# Altium PCB PCB.PcbDoc (part 2 of 6)
Units mm, origin at the board's own origin, x right, y up, seen from the top; angles counter-clockwise.
Board outline 190 x 64 mm, 6 copper layers (SIG 1, GND 1, SIG 2, PWR, GND 2, SIG 3), stack 1.565 mm thick; 489 components, 387 nets, 1828 pads, 1817 vias.
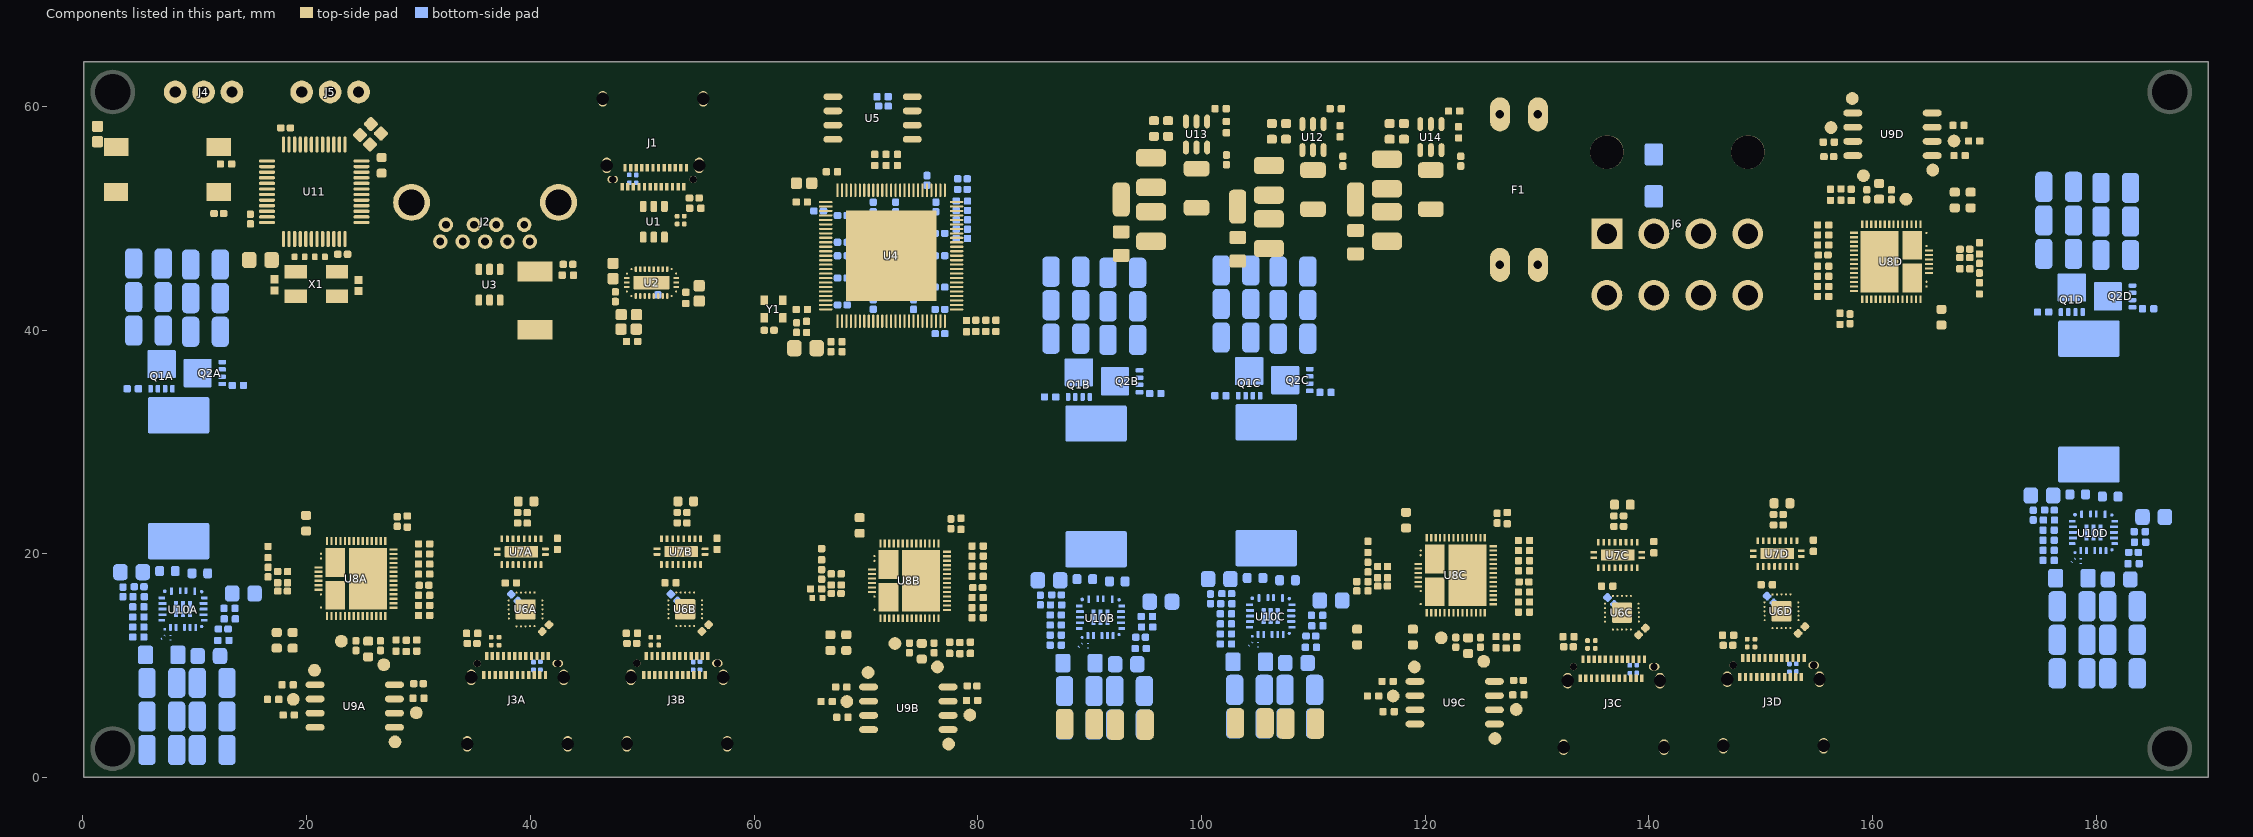
[diagram p6: the components of this part, seen from the top]

## Components (designator, comment, footprint, x,y, rotation, side; value= is the part's Value field where it differs from the comment) (continued)
R55A "4.7k 5% 0402" RESC1005X04M 30,7.1 r180 top value=4k7 (schematic designator R55)
R55B "4.7k 5% 0402" RESC1005X04M 79.5,6.9 r180 top value=4k7 (schematic designator R55)
R55C "4.7k 5% 0402" RESC1005X04M 128.35,7.4 r180 top value=4k7 (schematic designator R55)
R55D "4.7k 5% 0402" RESC1005X04M 156.1,56.825 r0 top value=4k7 (schematic designator R55)
R56A "715k 1% 0402" RESC1005X04M 13.099,15.136 r180 bottom value=715k (schematic designator R56)
R56B "715k 1% 0402" RESC1005X04M 95.129,14.407 r180 bottom value=715k (schematic designator R56)
R56C "715k 1% 0402" RESC1005X04M 110.348,14.514 r180 bottom value=715k (schematic designator R56)
R56D "715k 1% 0402" RESC1005X04M 183.909,21.992 r180 bottom value=715k (schematic designator R56)
R57A "0 Ohm 1% 0402" RESC1005X04M 4.451,34.772 r180 bottom value=0 (schematic designator R57)
R57B "0 Ohm 1% 0402" RESC1005X04M 86.481,34.043 r180 bottom value=0 (schematic designator R57)
R57C "0 Ohm 1% 0402" RESC1005X04M 101.7,34.15 r180 bottom value=0 (schematic designator R57)
R57D "0 Ohm 1% 0402" RESC1005X04M 175.261,41.628 r180 bottom value=0 (schematic designator R57)
R58A "0 Ohm 1% 0402" RESC1005X04M 13.851,35.072 r0 bottom value=0 (schematic designator R58)
R58B "0 Ohm 1% 0402" RESC1005X04M 95.881,34.343 r0 bottom value=0 (schematic designator R58)
R58C "0 Ohm 1% 0402" RESC1005X04M 111.1,34.45 r0 bottom value=0 (schematic designator R58)
R58D "0 Ohm 1% 0402" RESC1005X04M 184.661,41.928 r0 bottom value=0 (schematic designator R58)
R59A "100k 1% 0402" RESC1005X04M 13.125,14.197 r0 bottom value=100k (schematic designator R59)
R59B "100k 1% 0402" RESC1005X04M 95.154,13.467 r0 bottom value=100k (schematic designator R59)
R59C "100k 1% 0402" RESC1005X04M 110.373,13.574 r0 bottom value=100k (schematic designator R59)
R59D "100k 1% 0402" RESC1005X04M 183.935,21.052 r0 bottom value=100k (schematic designator R59)
R60A "10m 1W 1% 1206" R1206 7.03,10.973 r180 bottom value=10m (schematic designator R60)
R60B "10m 1W 1% 1206" R1206 89.06,10.243 r180 bottom value=10m (schematic designator R60)
R60C "10m 1W 1% 1206" R1206 104.279,10.351 r180 bottom value=10m (schematic designator R60)
R60D "10m 1W 1% 1206" R1206 177.841,17.828 r180 bottom value=10m (schematic designator R60)
R61A "100k 1% 0402" RESC1005X04M 4.951,13.472 r0 bottom value=100k (schematic designator R61)
R61B "100k 1% 0402" RESC1005X04M 86.981,12.743 r0 bottom value=100k (schematic designator R61)
R61C "100k 1% 0402" RESC1005X04M 102.2,12.85 r0 bottom value=100k (schematic designator R61)
R61D "100k 1% 0402" RESC1005X04M 175.761,20.328 r0 bottom value=100k (schematic designator R61)
R62A "29k4 1% 0402" RESC1005X04M 4.951,12.572 r180 bottom value=29k4 (schematic designator R62)
R62B "29k4 1% 0402" RESC1005X04M 86.981,11.843 r180 bottom value=29k4 (schematic designator R62)
R62C "29k4 1% 0402" RESC1005X04M 102.2,11.95 r180 bottom value=29k4 (schematic designator R62)
R62D "29k4 1% 0402" RESC1005X04M 175.761,19.428 r180 bottom value=29k4 (schematic designator R62)
R63A "20k 0402 1%" RESC1005X04M 4.951,15.272 r180 bottom value=20k (schematic designator R63)
R63B "20k 0402 1%" RESC1005X04M 86.981,14.543 r180 bottom value=20k (schematic designator R63)
R63C "20k 0402 1%" RESC1005X04M 102.2,14.65 r180 bottom value=20k (schematic designator R63)
R63D "20k 0402 1%" RESC1005X04M 175.761,22.128 r180 bottom value=20k (schematic designator R63)
R64A "39k 1% 0402" RESC1005X04M 12.551,12.272 r0 bottom value=39k (schematic designator R64)
R64B "39k 1% 0402" RESC1005X04M 94.581,11.543 r0 bottom value=39k (schematic designator R64)
R64C "39k 1% 0402" RESC1005X04M 109.8,11.65 r0 bottom value=39k (schematic designator R64)
R64D "39k 1% 0402" RESC1005X04M 183.361,19.128 r0 bottom value=39k (schematic designator R64)
R65A "59k 1% 0402" RESC1005X04M 4.98,16.172 r180 bottom value=59k (schematic designator R65)
R65B "59k 1% 0402" RESC1005X04M 87.01,15.443 r180 bottom value=59k (schematic designator R65)
R65C "59k 1% 0402" RESC1005X04M 102.228,15.55 r180 bottom value=59k (schematic designator R65)
R65D "59k 1% 0402" RESC1005X04M 175.79,23.028 r180 bottom value=59k (schematic designator R65)
R66A "0 Ohm 1% 0402" RESC1005X04M 4.951,14.372 r180 bottom value=0 (schematic designator R66)
R66B "0 Ohm 1% 0402" RESC1005X04M 86.981,13.643 r180 bottom value=0 (schematic designator R66)
R66C "0 Ohm 1% 0402" RESC1005X04M 102.2,13.75 r180 bottom value=0 (schematic designator R66)
R66D "0 Ohm 1% 0402" RESC1005X04M 175.761,21.228 r180 bottom value=0 (schematic designator R66)
R67 "100R2F" RESC0402(1005)_L 19.364,46.57 r0 top value=100
R68 "100R2F" RESC0402(1005)_L 21.185,46.57 r180 top value=100
R69 "0 Ohm 1% 0805" RESC2013X06M 103.251,47.244 r270 top value=0
R70 "162k 1% 0402" RESC1005X04M 112.014,59.817 r180 top value=162k
R71 "30.9k 1% 0402" RESC1005X04M 112.4,57.8 r270 top value=30k9
R72 "0 Ohm 1% 0805" RESC2013X06M 92.837,47.752 r270 top value=0
R73 "180k 1% 0402" RESC1005X04M 101.727,59.817 r180 top value=180k
R74 "62k 1% 0402" RESC1005X04M 102.235,58.166 r270 top value=62k
R75 "0 Ohm 1% 0805" RESC2013X06M 113.792,47.879 r270 top value=0
R76 "24.9k 1% 0402" RESC1005X04M 122.6,59.6 r180 top value=24k9
R77 "62k 1% 0402" RESC1005X04M 123,57.7 r270 top value=62k
R78 "10k 1% 0402" RESC1005X04M 12.791,54.866 r180 top value=10k
R79 "0 Ohm 1% 0603" RESC1508X05M 25.25,57.95 r225 top value=0
R80 "0 Ohm 1% 0603" RESC1508X05M 26.15,57.1 r225 top value=0
SW1 "FSMSM" TECO-FSMSM-2_V 7.555,56.372 r0 top
SW2 "FSMSM" TECO-FSMSM-2_V 7.545,52.355 r180 top
TP1A "45mil Test Point" "45mil Test Point Footprint" 23.1,12.2 r90 top (schematic designator TP1)
TP1B "45mil Test Point" "45mil Test Point Footprint" 72.6,12 r90 top (schematic designator TP1)
TP1C "45mil Test Point" "45mil Test Point Footprint" 121.45,12.5 r90 top (schematic designator TP1)
TP1D "45mil Test Point" "45mil Test Point Footprint" 163,51.725 r270 top (schematic designator TP1)
TP2A "45mil Test Point" "45mil Test Point Footprint" 26.9,10.1 r90 top (schematic designator TP2)
TP2B "45mil Test Point" "45mil Test Point Footprint" 76.4,9.9 r90 top (schematic designator TP2)
TP2C "45mil Test Point" "45mil Test Point Footprint" 125.25,10.4 r90 top (schematic designator TP2)
TP2D "45mil Test Point" "45mil Test Point Footprint" 159.2,53.825 r270 top (schematic designator TP2)
TP3A "45mil Test Point" "45mil Test Point Footprint" 20.7,9.6 r90 top (schematic designator TP3)
TP3B "45mil Test Point" "45mil Test Point Footprint" 70.2,9.4 r90 top (schematic designator TP3)
TP3C "45mil Test Point" "45mil Test Point Footprint" 119.05,9.9 r90 top (schematic designator TP3)
TP3D "45mil Test Point" "45mil Test Point Footprint" 165.4,54.325 r270 top (schematic designator TP3)
TP4A "45mil Test Point" "45mil Test Point Footprint" 18.8,7 r90 top (schematic designator TP4)
TP4B "45mil Test Point" "45mil Test Point Footprint" 68.3,6.8 r90 top (schematic designator TP4)
TP4C "45mil Test Point" "45mil Test Point Footprint" 117.15,7.3 r90 top (schematic designator TP4)
TP4D "45mil Test Point" "45mil Test Point Footprint" 167.3,56.925 r270 top (schematic designator TP4)
TP5A "45mil Test Point" "45mil Test Point Footprint" 29.8,5.8 r90 top (schematic designator TP5)
TP5B "45mil Test Point" "45mil Test Point Footprint" 79.3,5.6 r90 top (schematic designator TP5)
TP5C "45mil Test Point" "45mil Test Point Footprint" 128.15,6.1 r90 top (schematic designator TP5)
TP5D "45mil Test Point" "45mil Test Point Footprint" 156.3,58.125 r270 top (schematic designator TP5)
TP6A "45mil Test Point" "45mil Test Point Footprint" 27.9,3.2 r90 top (schematic designator TP6)
TP6B "45mil Test Point" "45mil Test Point Footprint" 77.4,3 r90 top (schematic designator TP6)
TP6C "45mil Test Point" "45mil Test Point Footprint" 126.25,3.5 r90 top (schematic designator TP6)
TP6D "45mil Test Point" "45mil Test Point Footprint" 158.2,60.725 r270 top (schematic designator TP6)
TP7 "SMT Test Point 5015" "New footprint 1" 103.251,51.054 r270 top
TP8 "SMT Test Point 5015" "New footprint 1" 92.837,51.689 r270 top
TP9 "SMT Test Point 5015" "New footprint 1" 113.792,51.689 r270 top
U1 "USBLC6-2SC6" SOT95P280X145-6N 51.039,49.705 r90 top
U2 "HD3SS3220IRNHT" FP-RNH0030A-MFG 50.836,44.269 r90 top
U3 "USBLC6-2SC6" SOT95P280X145-6N 36.35,44.075 r90 top
U4 "USB7206C-I/KDX" FP-C04-407-IPC_A 72.262,46.669 r90 top
U5 "W25Q128JVSIM" SOIC127P790X216-8N 70.6,58.98 r0 top
U6A "TPD6S300RUKR" FP-RUK0020B-MFG 39.572,15.044 r180 top (schematic designator U6)
U6B "TPD6S300RUKR" FP-RUK0020B-MFG 53.847,15.052 r180 top (schematic designator U6)
U6C "TPD6S300RUKR" FP-RUK0020B-MFG 137.602,14.749 r180 top (schematic designator U6)
U6D "TPD6S300RUKR" FP-RUK0020B-MFG 151.872,14.877 r180 top (schematic designator U6)
U7A "HD3SS3212IRKSR" FP-RKS0020A-MFG 39.2,20.2 r270 top (schematic designator U7)
U7B "HD3SS3212IRKSR" FP-RKS0020A-MFG 53.475,20.208 r270 top (schematic designator U7)
U7C "HD3SS3212IRKSR" FP-RKS0020A-MFG 137.23,19.905 r270 top (schematic designator U7)
U7D "HD3SS3212IRKSR" FP-RKS0020A-MFG 151.5,20.033 r270 top (schematic designator U7)
U8A "TPS65987DDHRSHR" FP-RSH0056E-MFG 24.417,17.8 r0 top (schematic designator U8)
U8B "TPS65987DDHRSHR" FP-RSH0056E-MFG 73.9,17.6 r0 top (schematic designator U8)
U8C "TPS65987DDHRSHR" FP-RSH0056E-MFG 122.75,18.1 r0 top (schematic designator U8)
U8D "TPS65987DDHRSHR" FP-RSH0056E-MFG 161.7,46.125 r180 top (schematic designator U8)
U9A "W25Q128JVSIM" SOIC127P790X216-8N 24.3,6.4 r0 top (schematic designator U9)
U9B "W25Q128JVSIM" SOIC127P790X216-8N 73.8,6.2 r0 top (schematic designator U9)
U9C "W25Q128JVSIM" SOIC127P790X216-8N 122.65,6.7 r0 top (schematic designator U9)
U9D "W25Q128JVSIM" SOIC127P790X216-8N 161.8,57.525 r180 top (schematic designator U9)
U10A "TPS55288RPMR" FP-RPM0026A-MFG 8.951,15.072 r180 bottom (schematic designator U10)
U10B "TPS55288RPMR" FP-RPM0026A-MFG 90.981,14.343 r180 bottom (schematic designator U10)
U10C "TPS55288RPMR" FP-RPM0026A-MFG 106.2,14.45 r180 bottom (schematic designator U10)
U10D "TPS55288RPMR" FP-RPM0026A-MFG 179.761,21.928 r180 bottom (schematic designator U10)
U11 "STM32F070CBT6TR" STM-LQFP48_N 20.675,52.389 r90 top
U12 "AP63201WU-7" FP-TSOT26-IPC_B 109.982,57.277 r270 top
U13 "AP63201WU-7" FP-TSOT26-IPC_B 99.568,57.509 r270 top
U14 "AP63201WU-7" FP-TSOT26-IPC_B 120.523,57.277 r270 top
X1 "7B-8.000MAAJ-T" TXC-7B-4_V 20.862,44.132 r0 top
Y1 "DSC1001DI1-025.0000" FP-CDFN2520-4LD-PL-1-MFG 61.75,41.894 r90 top

## Footprints (in the part's own frame and the unit in brackets; to place one, negate y for a bottom-side part, rotate by r counter-clockwise, add the part's x,y. Pads: shape width x height; smd on the part's side, far side on the other; paste and mask are expansions set on the pad)
"3x0.1\" Header-Footprint-1" [mil]
  round 80 hole 40: 1(0,0) 2(100,0) 3(200,0)
  silkscreen extent -121,-75 275,75
"10uH 2.5A SL0420-100M-Footprint-1" [mm]
  rrect50% 1.4x2.3 smd: 1(-1.75,0) 2(1.75,0)
  body extent -2.15,-2 2.15,2, height 2.2
"45mil Test Point Footprint" [mil]
  round 45 smd: 0(0,0)
3557-2-Footprint-1 [mil]
  rrect100% 120x70 hole 30 slot 75 at 0 deg: 1(-265,-67) 1(-265,67) 2(265,-67) 2(265,67)
  silkscreen extent -395,-138 395,138, body extent -390,-132 390,132, height 292
692121030100 [mm] "USB 3.0 Type A Horizontal"
  round 1.3 hole 0.7: 1(-3.5,5.54) 2(-1,5.54) 3(1,5.54) 4(3.5,5.54) 5(4,7.04) 6(2,7.04) 7(0,7.04) 8(-2,7.04) 9(-4,7.04)
  round 3.3 hole 2.3: Shell(-6.57,3.54) Shell(6.57,3.54)
  silkscreen extent -7.55,-8.24 7.55,8.24, body extent -7.74,-8.24 7.74,8.31, height 8.07
CAPC0603X03N [mm] "Chip Capacitor, 2-Leads, Body 0.60x0.30mm, IPC Medium Density"
  rrect50% 0.42x0.42 smd: 1(-0.35,0) 2(0.35,0)
  body extent -0.32,-0.17 0.32,0.17, height 0.33
CAPC1005X06N [mm] "Chip Capacitor, 2-Leads, Body 1.00x0.50mm, IPC Medium Density"
  rrect50% 0.68x0.64 smd: 1(-0.43,0) 2(0.43,0)
  body extent -0.55,-0.3 0.55,0.3, height 0.6
CAPC1005X55X25ML05T05 [mm] "Chip Capacitor, 2-Leads, Body 1.05x0.55mm, IPC Low Density"
  rect 0.72x0.72 smd: 1(-0.51,0) 2(0.51,0)
  body extent -0.53,-0.28 0.53,0.28, height 0.55
CAPC1608X08N [mm] "Chip Capacitor, 2-Leads, Body 1.60x0.75mm, IPC Medium Density"
  rrect50% 0.8x0.9 smd: 1(-0.7,0) 2(0.7,0)
  body extent -0.87,-0.43 0.87,0.43, height 0.8
CAPC2012X14N [mm] "Chip Capacitor, 2-Leads, Body 2.00x1.25mm, IPC Medium Density"
  rrect50% 1.3x1.45 smd: 1(-1,0) 2(1,0)
  body extent -1.1,-0.72 1.1,0.72, height 1.45
CAPC3225X18N [mm] "Chip Capacitor, 2-Leads, Body 3.20x2.50mm, IPC Medium Density"
  rrect50% 1.55x2.7 smd: 1(-1.325,0) 2(1.325,0)
  body extent -1.75,-1.35 1.75,1.35, height 1.75
DO-214AC [mm] "DO-214AC Diode Package"
  rrect25% 2x1.65 smd: 1(-1.875,0) 2(1.875,0)
  silkscreen extent -3.17,-1.4 2.4,1.5, body extent -2.52,-1.42 2.52,1.42, height 2.29
FP-172448-0008-MFG [mm]
  rect 2.75x2.75 hole 1.8 paste-2539.97 mask+0: 1(6.1,7.5)
  round 2.75 hole 1.8 paste-2539.97 mask+0: 2(1.9,7.5) 3(-2.3,7.5) 4(-6.5,7.5) 5(6.1,13) 6(1.9,13) 7(-2.3,13) 8(-6.5,13)
  round 3 hole 3 unplated paste-2539.97 mask+0: ""(-6.5,0.2) ""(6.1,0.2)
  silkscreen extent -9.39,-6.78 9.39,7.62, body extent -9.49,-6.88 9.49,14.48, height 0.25
FP-12401832E402A-MFG [mm]
  rrect100% 0.8x1.4 hole 1.1 slot 0.5 at 0 deg paste-2539.97 mask+0: 1(-4.13,3.115) 2(4.13,3.115) 3(-4.49,-2.835) 4(4.49,-2.835)
  rect 0.3x0.7 smd paste+0 mask+0: A1(-2.75,5.025) A2(-2.25,5.025) A3(-1.75,5.025) A4(-1.25,5.025) A5(-0.75,5.025) A6(-0.25,5.025) A7(0.25,5.025) A8(0.75,5.025) A9(1.25,5.025) A10(1.75,5.025) A11(2.25,5.025) A12(2.75,5.025) B1(2.5,3.325) B2(2,3.325) B3(1.5,3.325) B4(1,3.325) B5(0.5,3.325) B6(0,3.325) B7(-0.5,3.325) B8(-1,3.325) B9(-1.5,3.325) B10(-2,3.325) B11(-2.5,3.325) B12(-3,3.325)
  round 0.65 hole 0.65 unplated paste-2539.97 mask+0: ""(-3.6,4.365)
  rrect100% 0.95x0.65 hole 0.65 slot 0.95 at 0 deg unplated paste-2539.97 mask+0: ""(3.6,4.365)
  silkscreen extent -5.01,-1.76 4.99,6.21, body extent -4.99,-5.45 4.99,5.48, height 0.25
FP-C04-407-IPC_A [mm]
  rect 1.21x0.192 smd paste+0 mask+0: 1(-5.851,4.8)
  rrect100% 1.21x0.192 smd paste+0 mask+0: 2(-5.851,4.4) 3(-5.851,4) 4(-5.851,3.6) 5(-5.851,3.2) 6(-5.851,2.8) 7(-5.851,2.4) 8(-5.851,2) 9(-5.851,1.6) 10(-5.851,1.2) 11(-5.851,0.8) 12(-5.851,0.4) 13(-5.851,0) 14(-5.851,-0.4) 15(-5.851,-0.8) 16(-5.851,-1.2) 17(-5.851,-1.6) 18(-5.851,-2) 19(-5.851,-2.4) 20(-5.851,-2.8) 21(-5.851,-3.2) 22(-5.851,-3.6) 23(-5.851,-4) 24(-5.851,-4.4) 25(-5.851,-4.8) 51(5.851,-4.8) 52(5.851,-4.4) 53(5.851,-4) 54(5.851,-3.6) 55(5.851,-3.2) 56(5.851,-2.8) 57(5.851,-2.4) 58(5.851,-2) 59(5.851,-1.6) 60(5.851,-1.2) 61(5.851,-0.8) 62(5.851,-0.4) 63(5.851,0) 64(5.851,0.4) 65(5.851,0.8) 66(5.851,1.2) 67(5.851,1.6) 68(5.851,2) 69(5.851,2.4) 70(5.851,2.8) 71(5.851,3.2) 72(5.851,3.6) 73(5.851,4) 74(5.851,4.4) 75(5.851,4.8)
  rrect100% 0.192x1.21 smd paste+0 mask+0: 26(-4.8,-5.851) 27(-4.4,-5.851) 28(-4,-5.851) 29(-3.6,-5.851) 30(-3.2,-5.851) 31(-2.8,-5.851) 32(-2.4,-5.851) 33(-2,-5.851) 34(-1.6,-5.851) 35(-1.2,-5.851) 36(-0.8,-5.851) 37(-0.4,-5.851) 38(0,-5.851) 39(0.4,-5.851) 40(0.8,-5.851) 41(1.2,-5.851) 42(1.6,-5.851) 43(2,-5.851) 44(2.4,-5.851) 45(2.8,-5.851) 46(3.2,-5.851) 47(3.6,-5.851) 48(4,-5.851) 49(4.4,-5.851) 50(4.8,-5.851) 76(4.8,5.851) 77(4.4,5.851) 78(4,5.851) 79(3.6,5.851) 80(3.2,5.851) 81(2.8,5.851) 82(2.4,5.851) 83(2,5.851) 84(1.6,5.851) 85(1.2,5.851) 86(0.8,5.851) 87(0.4,5.851) 88(0,5.851) 89(-0.4,5.851) 90(-0.8,5.851) 91(-1.2,5.851) 92(-1.6,5.851) 93(-2,5.851) 94(-2.4,5.851) 95(-2.8,5.851) 96(-3.2,5.851) 97(-3.6,5.851) 98(-4,5.851) 99(-4.4,5.851) 100(-4.8,5.851)
  rect 8.1x8.1 smd paste-1000 mask+0: 101(0,0)
  silkscreen extent -7.38,-6 6,6, body extent -6.96,-6.96 6.96,6.96, height 0.25
FP-CDFN2520-4LD-PL-1-MFG [mm]
  rect 0.85x0.65 smd paste+0 mask+0: 1(-0.775,0.825) 2(-0.775,-0.825) 3(0.775,-0.825) 4(0.775,0.825)
  silkscreen extent -1.87,-0.13 1.02,0.95, body extent -1.3,-1.38 1.3,1.38, height 0.25
FP-DNH0008A-MFG [mm]
  rrect50% 0.7x0.4 smd paste-1000 mask-1000: 1(-1.55,0.975) 2(-1.55,0.325) 3(-1.55,-0.325) 4(-1.55,-0.975)
  rrect8% 2.51x2.55 smd paste-1000 mask-1000: 5-6-7-8(0.645,0)
  silkscreen extent -2.57,-1.73 1.55,1.73, body extent -1.65,-1.66 1.65,1.66, height 0.9
FP-RKS0020A-MFG [mm]
  rrect40% 0.25x0.6 smd paste+0 mask+0: 1(-0.25,2.15) 10(-0.25,-2.15) 11(0.25,-2.15) 20(0.25,2.15)
  rrect40% 0.6x0.25 smd paste+0 mask+0: 2(-1.15,1.75) 3(-1.15,1.25) 4(-1.15,0.75) 5(-1.15,0.25) 6(-1.15,-0.25) 7(-1.15,-0.75) 8(-1.15,-1.25) 9(-1.15,-1.75) 12(1.15,-1.75) 13(1.15,-1.25) 14(1.15,-0.75) 15(1.15,-0.25) 16(1.15,0.25) 17(1.15,0.75) 18(1.15,1.25) 19(1.15,1.75)
  rrect10% 1x3 smd paste-1000 mask+0: 21(0,0)
  silkscreen extent -1.3,-2.3 1.3,3.1, body extent -1.25,-2.25 1.25,2.25, height 1
FP-RNH0030A-MFG [mm]
  round 0.18 smd paste+0 mask+0: 1(-1.2,1.8) 10(-1.2,-1.8) 11(-0.8,-2.2) 15(0.8,-2.2) 16(1.2,-1.8) 25(1.2,1.8) 26(0.8,2.2) 30(-0.8,2.2)
  rrect50% 0.5x0.2 smd paste+0 mask+0: 2(-1.2,1.4) 3(-1.2,1) 4(-1.2,0.6) 5(-1.2,0.2) 6(-1.2,-0.2) 7(-1.2,-0.6) 8(-1.2,-1) 9(-1.2,-1.4) 17(1.2,-1.4) 18(1.2,-1) 19(1.2,-0.6) 20(1.2,-0.2) 21(1.2,0.2) 22(1.2,0.6) 23(1.2,1) 24(1.2,1.4)
  rrect50% 0.2x0.5 smd paste+0 mask+0: 12(-0.4,-2.2) 13(0,-2.2) 14(0.4,-2.2) 27(0.4,2.2) 28(0,2.2) 29(-0.4,2.2)
  rrect8% 1.2x3.2 smd paste-1000 mask+0: 31(0,0)
  SIG 1 region: 1.4,-1.9 1.04,-1.9 0.95,-1.81 0.95,-1.75 0.957,-1.725 0.975,-1.707 1,-1.7 1,-1.7 1.4,-1.7 1.425,-1.707 1.443,-1.725 1.45,-1.75 1.45,-1.75 1.45,-1.85 1.446,-1.869 1.435,-1.885 1.419,-1.896 1.4,-1.9
  SIG 1 region: 1.4,1.9 1.04,1.9 0.95,1.81 0.95,1.75 0.957,1.725 0.975,1.707 1,1.7 1,1.7 1.4,1.7 1.425,1.707 1.443,1.725 1.45,1.75 1.45,1.75 1.45,1.85 1.446,1.869 1.435,1.885 1.419,1.896 1.4,1.9
  SIG 1 region: -1.4,-1.9 -1.04,-1.9 -0.95,-1.81 -0.95,-1.75 -0.957,-1.725 -0.975,-1.707 -1,-1.7 -1,-1.7 -1.4,-1.7 -1.425,-1.707 -1.443,-1.725 -1.45,-1.75 -1.45,-1.75 -1.45,-1.85 -1.446,-1.869 -1.435,-1.885 -1.419,-1.896 -1.4,-1.9
  SIG 1 region: -1.4,1.9 -1.04,1.9 -0.95,1.81 -0.95,1.75 -0.957,1.725 -0.975,1.707 -1,1.7 -1,1.7 -1.4,1.7 -1.425,1.707 -1.443,1.725 -1.45,1.75 -1.45,1.75 -1.45,1.85 -1.446,1.869 -1.435,1.885 -1.419,1.896 -1.4,1.9
  SIG 1 region: 0.9,-2.4 0.9,-2.04 0.81,-1.95 0.75,-1.95 0.725,-1.957 0.707,-1.975 0.7,-2 0.7,-2 0.7,-2.4 0.707,-2.425 0.725,-2.443 0.75,-2.45 0.75,-2.45 0.85,-2.45 0.869,-2.446 0.885,-2.435 0.896,-2.419 0.9,-2.4
  SIG 1 region: -0.9,-2.4 -0.9,-2.04 -0.81,-1.95 -0.75,-1.95 -0.725,-1.957 -0.707,-1.975 -0.7,-2 -0.7,-2 -0.7,-2.4 -0.707,-2.425 -0.725,-2.443 -0.75,-2.45 -0.75,-2.45 -0.85,-2.45 -0.869,-2.446 -0.885,-2.435 -0.896,-2.419 -0.9,-2.4
  SIG 1 region: 0.9,2.4 0.9,2.04 0.81,1.95 0.75,1.95 0.725,1.957 0.707,1.975 0.7,2 0.7,2 0.7,2.4 0.707,2.425 0.725,2.443 0.75,2.45 0.75,2.45 0.85,2.45 0.869,2.446 0.885,2.435 0.896,2.419 0.9,2.4
  SIG 1 region: -0.9,2.4 -0.9,2.04 -0.81,1.95 -0.75,1.95 -0.725,1.957 -0.707,1.975 -0.7,2 -0.7,2 -0.7,2.4 -0.707,2.425 -0.725,2.443 -0.75,2.45 -0.75,2.45 -0.85,2.45 -0.869,2.446 -0.885,2.435 -0.896,2.419 -0.9,2.4
  silkscreen extent -1.84,-2.4 1.4,2.4, body extent -1.55,-2.55 1.55,2.55, height 0.25
FP-RPM0026A-MFG [mm]
  round 0.306 smd paste+0 mask+0: 1(-1.661,1.555)
  rrect40% 0.6x0.25 smd paste+0 mask+0: 2(-1.9,1) 6(-1.9,-1) 14(1.9,-1) 18(1.9,1)
  rrect40% 0.725x0.25 smd paste+0 mask+0: 3(-1.837,0.5) 4(-1.837,0) 5(-1.837,-0.5) 15(1.837,-0.5) 16(1.837,0) 17(1.837,0.5)
  round 0.29 smd paste+0 mask+0: 7(-1.661,-1.554)
  rrect40% 0.25x0.625 smd paste+0 mask+0: 8(-1.125,-1.637) 9(-0.625,-1.637) 10(-0.125,-1.637) 11(0.625,-1.637) 12(1.125,-1.637)
  round 0.259 smd paste+0 mask+0: 13(1.644,-1.805)
  round 0.332 smd paste+0 mask+0: 19(1.641,1.591)
  rrect40% 0.25x0.675 smd paste+0 mask+0: 20(1.05,1.613) 23(-1.05,1.613)
  rrect40% 0.25x0.6 smd paste+0 mask+0: 21(0.25,1.65) 22(-0.25,1.65)
  rrect27% 0.375x1.425 smd paste+0 mask+0: 24(-0.625,0) 25(0,0) 26(0.625,0)
  SIG 1 region: -2.2,1.425 -2.2,1.55 -2.193,1.575 -2.175,1.593 -2.15,1.6 -2.15,1.6 -1.825,1.6 -1.825,1.9 -1.818,1.925 -1.8,1.943 -1.775,1.95 -1.775,1.95 -1.475,1.95 -1.456,1.946 -1.44,1.935 -1.429,1.919 -1.425,1.9 -1.425,1.9 -1.425,1.425 -1.429,1.406 -1.44,1.39 -1.456,1.379 -1.475,1.375 -1.475,1.375 -2.15,1.375 -2.169,1.379 -2.185,1.39 -2.196,1.406 -2.2,1.425
  SIG 1 region: 2.2,1.425 2.2,1.55 2.193,1.575 2.175,1.593 2.15,1.6 2.15,1.6 1.825,1.6 1.825,1.9 1.818,1.925 1.8,1.943 1.775,1.95 1.775,1.95 1.475,1.95 1.456,1.946 1.44,1.935 1.429,1.919 1.425,1.9 1.425,1.9 1.425,1.425 1.429,1.406 1.44,1.39 1.456,1.379 1.475,1.375 1.475,1.375 2.15,1.375 2.169,1.379 2.185,1.39 2.196,1.406 2.2,1.425 2.2,1.425
  SIG 1 region: -2.2,-1.549 -2.2,-1.424 -2.196,-1.405 -2.185,-1.389 -2.169,-1.378 -2.15,-1.374 -2.15,-1.374 -1.55,-1.374 -1.531,-1.378 -1.515,-1.389 -1.504,-1.405 -1.5,-1.424 -1.5,-1.424 -1.5,-1.899 -1.504,-1.918 -1.515,-1.934 -1.531,-1.945 -1.55,-1.949 -1.55,-1.949 -1.8,-1.949 -1.825,-1.942 -1.843,-1.924 -1.85,-1.899 -1.85,-1.899 -1.85,-1.599 -2.15,-1.599 -2.175,-1.592 -2.193,-1.574 -2.2,-1.549
  SIG 1 region: 2.2,-1.549 2.2,-1.424 2.193,-1.399 2.175,-1.381 2.15,-1.374 2.15,-1.374 1.55,-1.374 1.531,-1.378 1.515,-1.389 1.504,-1.405 1.5,-1.424 1.5,-1.424 1.5,-1.899 1.504,-1.918 1.515,-1.934 1.531,-1.945 1.55,-1.949 1.55,-1.949 1.8,-1.949 1.825,-1.942 1.843,-1.924 1.85,-1.899 1.85,-1.899 1.85,-1.599 2.15,-1.599 2.175,-1.592 2.193,-1.574 2.2,-1.549
  silkscreen extent -2.88,-2.12 2.37,2.12, body extent -2,-1.75 2,1.75, height 1
FP-RSH0056E-MFG [mm]
  round 0.194 smd paste+0 mask+0: 1-2(-3.137,2.213) 3-4(-3.137,1.787) 11-12(-3.137,-1.412) 13-14(-3.137,-2.587)
  rect 0.7x0.2 smd paste+0 mask+0: 5(-3.35,1) 6(-3.35,0.6) 7(-3.35,0.2) 8(-3.35,-0.2) 9(-3.35,-0.6) 10(-3.35,-1) 29(3.35,-2.6) 30(3.35,-2.2) 31(3.35,-1.8) 32(3.35,-1.4) 33(3.35,-1) 34(3.35,-0.6) 35(3.35,-0.2) 36(3.35,0.2) 37(3.35,0.6) 38(3.35,1) 39(3.35,1.4) 40(3.35,1.8) 41(3.35,2.2) 42(3.35,2.6)
  rect 0.2x0.7 smd paste+0 mask+0: 15(-2.6,-3.35) 16(-2.2,-3.35) 17(-1.8,-3.35) 18(-1.4,-3.35) 19(-1,-3.35) 20(-0.6,-3.35) 21(-0.2,-3.35) 22(0.2,-3.35) 23(0.6,-3.35) 24(1,-3.35) 25(1.4,-3.35) 26(1.8,-3.35) 27(2.2,-3.35) 28(2.6,-3.35) 43(2.6,3.35) 44(2.2,3.35) 45(1.8,3.35) 46(1.4,3.35) 47(1,3.35) 48(0.6,3.35) 49(0.2,3.35) 50(-0.2,3.35) 51(-0.6,3.35) 52(-1,3.35) 53(-1.4,3.35) 54(-1.8,3.35) 55(-2.2,3.35) 56(-2.6,3.35)
  rect 1.75x2.6 smd paste-1000 mask+0: 57(-1.875,1.45)
  rect 1.75x2.55 smd paste-1000 mask+0: 58(-1.875,-1.475)
  rect 3.4x5.5 smd paste-1000 mask+0: 59(1.05,0)
  SIG 1 region: -3.35,2.7 -3.7,2.7 -3.7,2.5 -3.2,2.5 -3.2,2.3 -3.7,2.3 -3.7,2.1 -3,2.1 -3,2.7
  SIG 1 region: -3.35,1.9 -3.7,1.9 -3.7,1.7 -3.2,1.7 -3.2,1.5 -3.7,1.5 -3.7,1.3 -3,1.3 -3,1.9
  SIG 1 region: -3.35,-1.3 -3.7,-1.3 -3.7,-1.5 -3.2,-1.5 -3.2,-1.7 -3.7,-1.7 -3.7,-1.9 -3,-1.9 -3,-1.3
  SIG 1 region: -3.35,-2.1 -3.7,-2.1 -3.7,-2.3 -3.2,-2.3 -3.2,-2.5 -3.7,-2.5 -3.7,-2.7 -3,-2.7 -3,-2.1
  silkscreen extent -4.45,-3.57 3.57,3.57, body extent -3.8,-3.8 3.8,3.8, height 0.25
FP-RUK0020B-MFG [mm]
  round 0.18 smd paste-1000 mask+0: 1(-1.51,0.8) 2(-1.51,0.4) 3(-1.51,0) 4(-1.5,-0.4) 5(-1.5,-0.8) 6(-0.8,-1.51) 7(-0.4,-1.51) 8(0,-1.51) 9(0.4,-1.5) 10(0.8,-1.5) 11(1.51,-0.8) 12(1.51,-0.4) 13(1.51,0) 14(1.5,0.4) 15(1.5,0.8) 16(0.8,1.51) 17(0.4,1.51) 18(0,1.51) 19(-0.4,1.5) 20(-0.8,1.5)
  rrect10% 1.8x1.8 smd paste-1000 mask+0: 21(0,0)
  SIG 1 region: -0.7,1.8 -0.7,1.2 -0.708,1.162 -0.729,1.129 -0.762,1.108 -0.8,1.1 -0.8,1.1 -0.838,1.108 -0.871,1.129 -0.892,1.162 -0.9,1.2 -0.9,1.2 -0.9,1.8 -0.892,1.838 -0.871,1.871 -0.838,1.892 -0.8,1.9 -0.8,1.9 -0.762,1.892 -0.729,1.871 -0.708,1.838 -0.7,1.8
  SIG 1 region: -0.3,1.8 -0.3,1.2 -0.308,1.162 -0.329,1.129 -0.362,1.108 -0.4,1.1 -0.4,1.1 -0.438,1.108 -0.471,1.129 -0.492,1.162 -0.5,1.2 -0.5,1.2 -0.5,1.8 -0.492,1.838 -0.471,1.871 -0.438,1.892 -0.4,1.9 -0.4,1.9 -0.362,1.892 -0.329,1.871 -0.308,1.838 -0.3,1.8
  SIG 1 region: 0.1,1.8 0.1,1.2 0.092,1.162 0.071,1.129 0.038,1.108 0,1.1 0,1.1 -0.038,1.108 -0.071,1.129 -0.092,1.162 -0.1,1.2 -0.1,1.2 -0.1,1.8 -0.092,1.838 -0.071,1.871 -0.038,1.892 0,1.9 0,1.9 0.038,1.892 0.071,1.871 0.092,1.838 0.1,1.8
  SIG 1 region: 0.5,1.8 0.5,1.2 0.492,1.162 0.471,1.129 0.438,1.108 0.4,1.1 0.4,1.1 0.362,1.108 0.329,1.129 0.308,1.162 0.3,1.2 0.3,1.2 0.3,1.8 0.313,1.85 0.35,1.887 0.4,1.9 0.4,1.9 0.438,1.892 0.471,1.871 0.492,1.838 0.5,1.8
  SIG 1 region: 0.9,1.8 0.9,1.2 0.892,1.162 0.871,1.129 0.838,1.108 0.8,1.1 0.8,1.1 0.762,1.108 0.729,1.129 0.708,1.162 0.7,1.2 0.7,1.2 0.7,1.8 0.708,1.838 0.729,1.871 0.762,1.892 0.8,1.9 0.8,1.9 0.838,1.892 0.871,1.871 0.892,1.838 0.9,1.8
  SIG 1 region: 0.7,-1.8 0.7,-1.2 0.708,-1.162 0.729,-1.129 0.762,-1.108 0.8,-1.1 0.8,-1.1 0.838,-1.108 0.871,-1.129 0.892,-1.162 0.9,-1.2 0.9,-1.2 0.9,-1.8 0.892,-1.838 0.871,-1.871 0.838,-1.892 0.8,-1.9 0.8,-1.9 0.762,-1.892 0.729,-1.871 0.708,-1.838 0.7,-1.8
  SIG 1 region: 0.3,-1.8 0.3,-1.2 0.308,-1.162 0.329,-1.129 0.362,-1.108 0.4,-1.1 0.4,-1.1 0.438,-1.108 0.471,-1.129 0.492,-1.162 0.5,-1.2 0.5,-1.2 0.5,-1.8 0.492,-1.838 0.471,-1.871 0.438,-1.892 0.4,-1.9 0.4,-1.9 0.35,-1.887 0.313,-1.85 0.3,-1.8
  SIG 1 region: -0.1,-1.8 -0.1,-1.2 -0.092,-1.162 -0.071,-1.129 -0.038,-1.108 0,-1.1 0,-1.1 0.038,-1.108 0.071,-1.129 0.092,-1.162 0.1,-1.2 0.1,-1.2 0.1,-1.8 0.092,-1.838 0.071,-1.871 0.038,-1.892 0,-1.9 0,-1.9 -0.05,-1.887 -0.087,-1.85 -0.1,-1.8
  SIG 1 region: -0.5,-1.8 -0.5,-1.2 -0.492,-1.162 -0.471,-1.129 -0.438,-1.108 -0.4,-1.1 -0.4,-1.1 -0.362,-1.108 -0.329,-1.129 -0.308,-1.162 -0.3,-1.2 -0.3,-1.2 -0.3,-1.8 -0.308,-1.838 -0.329,-1.871 -0.362,-1.892 -0.4,-1.9 -0.4,-1.9 -0.45,-1.887 -0.487,-1.85 -0.5,-1.8
  SIG 1 region: -0.9,-1.8 -0.9,-1.2 -0.892,-1.162 -0.871,-1.129 -0.838,-1.108 -0.8,-1.1 -0.8,-1.1 -0.762,-1.108 -0.729,-1.129 -0.708,-1.162 -0.7,-1.2 -0.7,-1.2 -0.7,-1.8 -0.708,-1.838 -0.729,-1.871 -0.762,-1.892 -0.8,-1.9 -0.8,-1.9 -0.85,-1.887 -0.887,-1.85 -0.9,-1.8
  SIG 1 region: 1.8,0.7 1.2,0.7 1.162,0.708 1.129,0.729 1.108,0.762 1.1,0.8 1.1,0.8 1.108,0.838 1.129,0.871 1.162,0.892 1.2,0.9 1.2,0.9 1.8,0.9 1.838,0.892 1.871,0.871 1.892,0.838 1.9,0.8 1.9,0.8 1.892,0.762 1.871,0.729 1.838,0.708 1.8,0.7
  SIG 1 region: 1.8,0.3 1.2,0.3 1.162,0.308 1.129,0.329 1.108,0.362 1.1,0.4 1.1,0.4 1.108,0.438 1.129,0.471 1.162,0.492 1.2,0.5 1.2,0.5 1.8,0.5 1.838,0.492 1.871,0.471 1.892,0.438 1.9,0.4 1.9,0.4 1.892,0.362 1.871,0.329 1.838,0.308 1.8,0.3
  SIG 1 region: 1.8,-0.1 1.2,-0.1 1.162,-0.092 1.129,-0.071 1.108,-0.038 1.1,0 1.1,0 1.108,0.038 1.129,0.071 1.162,0.092 1.2,0.1 1.2,0.1 1.8,0.1 1.838,0.092 1.871,0.071 1.892,0.038 1.9,0 1.9,0 1.887,-0.05 1.85,-0.087 1.8,-0.1
  SIG 1 region: 1.8,-0.5 1.2,-0.5 1.162,-0.492 1.129,-0.471 1.108,-0.438 1.1,-0.4 1.1,-0.4 1.108,-0.362 1.129,-0.329 1.162,-0.308 1.2,-0.3 1.2,-0.3 1.8,-0.3 1.838,-0.308 1.871,-0.329 1.892,-0.362 1.9,-0.4 1.9,-0.4 1.892,-0.438 1.871,-0.471 1.838,-0.492 1.8,-0.5
  SIG 1 region: 1.8,-0.9 1.2,-0.9 1.162,-0.892 1.129,-0.871 1.108,-0.838 1.1,-0.8 1.1,-0.8 1.108,-0.762 1.129,-0.729 1.162,-0.708 1.2,-0.7 1.2,-0.7 1.8,-0.7 1.838,-0.708 1.871,-0.729 1.892,-0.762 1.9,-0.8 1.9,-0.8 1.892,-0.838 1.871,-0.871 1.838,-0.892 1.8,-0.9
  SIG 1 region: -1.8,-0.7 -1.2,-0.7 -1.162,-0.708 -1.129,-0.729 -1.108,-0.762 -1.1,-0.8 -1.1,-0.8 -1.108,-0.838 -1.129,-0.871 -1.162,-0.892 -1.2,-0.9 -1.2,-0.9 -1.8,-0.9 -1.838,-0.892 -1.871,-0.871 -1.892,-0.838 -1.9,-0.8 -1.9,-0.8 -1.892,-0.762 -1.871,-0.729 -1.838,-0.708 -1.8,-0.7
  SIG 1 region: -1.8,-0.3 -1.2,-0.3 -1.162,-0.308 -1.129,-0.329 -1.108,-0.362 -1.1,-0.4 -1.1,-0.4 -1.108,-0.438 -1.129,-0.471 -1.162,-0.492 -1.2,-0.5 -1.2,-0.5 -1.8,-0.5 -1.838,-0.492 -1.871,-0.471 -1.892,-0.438 -1.9,-0.4 -1.9,-0.4 -1.892,-0.362 -1.871,-0.329 -1.838,-0.308 -1.8,-0.3
  SIG 1 region: -1.8,0.1 -1.2,0.1 -1.162,0.092 -1.129,0.071 -1.108,0.038 -1.1,0 -1.1,0 -1.108,-0.038 -1.129,-0.071 -1.162,-0.092 -1.2,-0.1 -1.2,-0.1 -1.8,-0.1 -1.838,-0.092 -1.871,-0.071 -1.892,-0.038 -1.9,0 -1.9,0 -1.892,0.038 -1.871,0.071 -1.838,0.092 -1.8,0.1
  SIG 1 region: -1.8,0.5 -1.2,0.5 -1.162,0.492 -1.129,0.471 -1.108,0.438 -1.1,0.4 -1.1,0.4 -1.108,0.362 -1.129,0.329 -1.162,0.308 -1.2,0.3 -1.2,0.3 -1.8,0.3 -1.838,0.308 -1.871,0.329 -1.892,0.362 -1.9,0.4 -1.9,0.4 -1.892,0.438 -1.871,0.471 -1.838,0.492 -1.8,0.5
  SIG 1 region: -1.8,0.9 -1.2,0.9 -1.162,0.892 -1.129,0.871 -1.108,0.838 -1.1,0.8 -1.1,0.8 -1.108,0.762 -1.129,0.729 -1.162,0.708 -1.2,0.7 -1.2,0.7 -1.8,0.7 -1.838,0.708 -1.871,0.729 -1.892,0.762 -1.9,0.8 -1.9,0.8 -1.887,0.85 -1.85,0.887 -1.8,0.9
  silkscreen extent -2.26,-1.55 1.55,1.55, body extent -2,-2 2,2, height 0.25
FP-TSOT26-IPC_B [mm]
  rrect100% 1.24x0.526 smd paste+0 mask+0: 1(-1.165,0.95) 2(-1.165,0) 3(-1.165,-0.95) 4(1.166,-0.95) 5(1.166,0) 6(1.166,0.95)
  silkscreen extent -1.27,-1.45 0.05,1.78, body extent -2.04,-1.7 2.04,1.7, height 0.25
INDP134126X58N [mm] "Precision Wire Wound Inductor, 2-Leads, Body 13.45x12.60mm, IPC Medium Density"
  rrect10% 3.25x5.5 smd: 1(-5.625,0) 2(5.625,0)
  silkscreen extent -6.9,-6.45 6.9,6.45, body extent -6.75,-6.3 6.75,6.3, height 5.62
LFUS-1812L16012_V [mm] "Chip Fuse, 2-Leads, Body 4.73x3.41mm"
  rect 1.78x3.15 smd: 1(-2.615,0) 2(2.615,0)
  silkscreen extent -1.35,-1.47 1.35,1.48, body extent -2.36,-1.71 2.36,1.71, height 0.75
"Net Tie SMD-Footprint-1" [mil]
  rect 4x8 smd paste-100 mask-10: 1(-8,0) 2(8,0)
  SIG 1 region: -7.01,4 6.99,4 6.99,-4 -7.01,-4
"New footprint 1" [mil]
  rrect50% 120x60 smd: 0(0,0)
  body extent -52,-20 52,20, height 60
R1206 [mil]
  rrect30% 53x65 smd: 1(-57,0) 2(57,0)
  body extent -61,-31 61,31, height 26
RESC0402(1005)_L [mm] "Chip Resistor, Body 1.0x0.5mm, IPC High Density"
  rrect25% 0.5x0.55 smd: 1(-0.45,0) 2(0.45,0)
  silkscreen extent 0,-0.2 0,0.2, body extent -0.5,-0.25 0.5,0.25, height 0.3
RESC1005X04M [mm] "R0402"
  rrect35% 0.65x0.65 smd: 1(-0.5,0) 2(0.5,0)
  body extent -0.53,-0.29 0.53,0.29, height 0.38
RESC1508X05M [mm] "R0603"
  rrect35% 1x1 smd: 1(-0.685,0) 2(0.685,0)
  body extent -0.82,-0.45 0.82,0.45, height 0.5
RESC2013X06M [mm] "R0805"
  rrect30% 1.15x1.5 smd: 1(-1.05,0) 2(1.05,0)
  body extent -1.07,-0.7 1.07,0.7, height 0.55
SOIC127P790X216-8N [mm] "SOIC, 8-Leads, Body 5.28x5.28mm, Pitch 1.27mm, IPC Medium Density"
  oval 1.7x0.6 smd: 1(-3.55,1.905) 2(-3.55,0.635) 3(-3.55,-0.635) 4(-3.55,-1.905) 5(3.55,-1.905) 6(3.55,-0.635) 7(3.55,0.635) 8(3.55,1.905)
  silkscreen extent -3.67,-2.7 2.3,2.88, body extent -3.95,-2.7 3.95,2.7, height 2.16
SOT95P280X145-6N [mm] "SOT23, 6-Leads, Body 2.93x2.80mm, Pitch 0.95mm, IPC Medium Density"
  rrect50% 1x0.6 smd: 1(-1.375,0.95) 2(-1.375,0) 3(-1.375,-0.95) 4(1.375,-0.95) 5(1.375,0) 6(1.375,0.95)
  silkscreen extent -1.5,-1.55 0.5,1.92, body extent -1.6,-1.53 1.6,1.53, height 1.45
STM-LQFP48_N [mm] "QFP, 48-Leads, Body 7x7mm, Pitch 0.5mm, IPC Medium Density"
  oval 1.45x0.3 smd: 1(-4.225,2.75) 2(-4.225,2.25) 3(-4.225,1.75) 4(-4.225,1.25) 5(-4.225,0.75) 6(-4.225,0.25) 7(-4.225,-0.25) 8(-4.225,-0.75) 9(-4.225,-1.25) 10(-4.225,-1.75) 11(-4.225,-2.25) 12(-4.225,-2.75) 25(4.225,-2.75) 26(4.225,-2.25) 27(4.225,-1.75) 28(4.225,-1.25) 29(4.225,-0.75) 30(4.225,-0.25) 31(4.225,0.25) 32(4.225,0.75) 33(4.225,1.25) 34(4.225,1.75) 35(4.225,2.25) 36(4.225,2.75)
  oval 0.3x1.45 smd: 13(-2.75,-4.225) 14(-2.25,-4.225) 15(-1.75,-4.225) 16(-1.25,-4.225) 17(-0.75,-4.225) 18(-0.25,-4.225) 19(0.25,-4.225) 20(0.75,-4.225) 21(1.25,-4.225) 22(1.75,-4.225) 23(2.25,-4.225) 24(2.75,-4.225) 37(2.75,4.225) 38(2.25,4.225) 39(1.75,4.225) 40(1.25,4.225) 41(0.75,4.225) 42(0.25,4.225) 43(-0.25,4.225) 44(-0.75,4.225) 45(-1.25,4.225) 46(-1.75,4.225) 47(-2.25,4.225) 48(-2.75,4.225)
  silkscreen extent -4.35,-3.1 3.1,3.57, body extent -3.5,-3.5 3.5,3.5, height 1.6
TECO-FSMSM-2_V [mm] "SMD, 2-Leads, Body 6x3.5mm, Pitch 9.19mm"
  rect 2.2x1.6 smd: 1(-4.595,0)
  rect 2.18x1.6 smd: 2(4.595,0)
  silkscreen extent -6.37,-1.75 3,1.75, body extent -4.98,-1.75 4.98,1.75, height 4.4
TXC-7B-4_V [mm] "SMD, 4-Leads, Body 5x3.2mm, Pitch 3.7mm"
  rect 2x1.2 smd: 1(-1.85,-1.1) 2(1.85,-1.1) 3(1.85,1.1) 4(-1.85,1.1)
  silkscreen extent -2.5,-2.37 2.5,1.6, body extent -2.5,-1.6 2.5,1.6, height 1.05

## Part data
C1 C2 C10 C11 C12 C13 C14 C15 C16 C17 C18 C20 C21 C22 C23 C24 C25 C26 C27 C29 C30 C40A C40B C40C C40D C73 C74 C78: library part CMP-001-00088-1, "16V 100nF X7R ±10% 0402 Multilayer Ceramic Capacitors MLCC - SMD/SMT ROHS", Dielectric=X7R, LCSC Part #=C1525, Package=0402, Voltage=16V
C3 C4 C5 C6: library part CMP-001-00107-1, "10V 100nF X5R ±10% 0201 Multilayer Ceramic Capacitors MLCC - SMD/SMT ROHS", Dielectric=X5R, LCSC Part #=C76934, Package=0402, Voltage=10V
C7 C8 C32A C32B C32C C32D C38A C38B C38C C38D C52A C52B C52C C52D C82 C87 C92: library part CMP-001-00088-2, "16V 100nF X7R ±10% 0402 Multilayer Ceramic Capacitors MLCC - SMD/SMT ROHS", Dielectric=X7R, LCSC Part #=C1525, Package=0402, Voltage=16V
C9 C28: library part CMP-001-00117-1, "10V 4.7uF X5R ±10% 0402 Multilayer Ceramic Capacitors MLCC - SMD/SMT ROHS", Dielectric=X5R, LCSC Part #=C368809, Package=0402, Voltage=10V
C19: library part CMP-001-00094-2, "50V 2.2uF X5R ±10% 0805 Multilayer Ceramic Capacitors MLCC - SMD/SMT ROHS", Dielectric=X5R, LCSC Part #=C377773, Package=0805, Voltage=50V
C31 C51A C51B C51C C51D: library part CMP-001-00116-1, "50V 10nF X7R ±10% 0402 Multilayer Ceramic Capacitors MLCC - SMD/SMT ROHS", Dielectric=X7R, LCSC Part #=C60133, Package=0402, Voltage=50V
C33A C33B C33C C33D: library part CMP-001-00098-2, "16V 1uF X5R ±10% 0402 Multilayer Ceramic Capacitors MLCC - SMD/SMT ROHS", Dielectric=X5R, LCSC Part #=C29266, Package=0402, Voltage=16V
C34A C34B C34C C34D C35A C35B C35C C35D C36A C36B C36C C36D C37A C37B C37C C37D: library part CMP-001-00107-2, "10V 100nF X5R ±10% 0201 Multilayer Ceramic Capacitors MLCC - SMD/SMT ROHS", Dielectric=X5R, LCSC Part #=C76934, Package=0402, Voltage=10V
C39A C39B C39C C39D: library part CMP-001-00103-2, "C0G 1nF 50V ±5% 0603 Multilayer Ceramic Capacitors MLCC - SMD/SMT ROHS", Dielectric=C0G, LCSC Part #=C342541, Package=0603, Voltage=50V
C41A C41B C41C C41D: library part CMP-001-00084-1, "10uF 10V 0402 20% X5R CAP MLCC", Dielectric=X5R, LCSC Part #=C527590, Voltage=10V
C42A C42B C42C C42D C43A C43B C43C C43D C44A C44B C44C C44D: library part CMP-001-00084-2, "10uF 10V 0402 20% X5R CAP MLCC", Dielectric=X5R, LCSC Part #=C527590, Voltage=10V
C45A C45B C45C C45D: library part CMP-001-00110-1, "10V 22uF X5R ±20% 0603 Multilayer Ceramic Capacitors MLCC - SMD/SMT ROHS", Dielectric=X5R, LCSC Part #=C86295, Package=0603, Voltage=10V
C46A C46B C46C C46D C47A C47B C47C C47D C48A C48B C48C C48D C83 C84 C88 C89 C93 C94: library part CMP-001-00102-2, "35V 10uF X5R ±20% 0603 Multilayer Ceramic Capacitors MLCC - SMD/SMT ROHS", Dielectric=X5R, LCSC Part #=C194427, Package=0603, Voltage=35V
C49A C49B C49C C49D C50A C50B C50C C50D: library part CMP-001-00115-1, "50V 220pF X7R ±10% 0402 Multilayer Ceramic Capacitors MLCC - SMD/SMT ROHS", Dielectric=X7R, LCSC Part #=C107025, Package=0402, Voltage=50V
C53A C53B C53C C53D C62A C62B C62C C62D: library part CMP-001-00094-1, "50V 2.2uF X5R ±10% 0805 Multilayer Ceramic Capacitors MLCC - SMD/SMT ROHS", Dielectric=X5R, LCSC Part #=C377773, Package=0805, Voltage=50V
C54A C54B C54C C54D C55A C55B C55C C55D C56A C56B C56C C56D C57A C57B C57C C57D C58A C58B C58C C58D C59A C59B C59C C59D C63A C63B C63C C63D C64A C64B C64C C64D C65A C65B C65C C65D C66A C66B C66C C66D C67A C67B C67C C67D C68A C68B C68C C68D: library part CMP-001-00092-1, "35V 22uF X5R ±20% 1210 Multilayer Ceramic Capacitors MLCC - SMD/SMT ROHS", Dielectric=X5R, LCSC Part #=C778721, Package=1210, Voltage=35V
C60A C60B C60C C60D C61A C61B C61C C61D: library part CMP-001-00093-1, "50V 100nF X7R ±10% 0603 Multilayer Ceramic Capacitors MLCC - SMD/SMT ROHS", Dielectric=X7R, LCSC Part #=C1591, Package=0603, Voltage=50V
C69A C69B C69C C69D C75: library part CMP-001-00089-1, "50V 4.7uF X5R ±10% 0805 Multilayer Ceramic Capacitors MLCC - SMD/SMT ROHS", Dielectric=X5R, LCSC Part #=C98192, Package=0805, Voltage=50V
C70A C70B C70C C70D: library part CMP-001-00113-1, "50V 68pF NP0 ±1% 0402 Multilayer Ceramic Capacitors MLCC - SMD/SMT ROHS", Dielectric=NP0, LCSC Part #=C389103, Package=0402, Voltage=50V
C71A C71B C71C C71D: library part CMP-001-00111-2, "50V 18nF X7R ±10% 0402 Multilayer Ceramic Capacitors MLCC - SMD/SMT ROHS", Dielectric=X7R, LCSC Part #=C576740, Package=0402, Voltage=50V
C72A C72B C72C C72D: library part CMP-001-00114-1, "50V 4.7nF X7R ±10% 0402 Multilayer Ceramic Capacitors MLCC - SMD/SMT ROHS", Dielectric=X7R, LCSC Part #=C1538, Package=0402, Voltage=50V
C76: library part CMP-001-00106-1, "50V 10nF X7R ±10% 0603 Multilayer Ceramic Capacitors MLCC - SMD/SMT ROHS", Dielectric=X7R, LCSC Part #=C100042, Package=0603, Voltage=50V
C77: library part CMP-001-00098-1, "16V 1uF X5R ±10% 0402 Multilayer Ceramic Capacitors MLCC - SMD/SMT ROHS", Dielectric=X5R, LCSC Part #=C29266, Package=0402, Voltage=16V
C80 C81: library part CMP-001-00013-6, "Chip Capacitor, 10 pF, +/- 5%, 50 V, 0402 (1005 Metric)", Capacitor Type=Ceramic, Case/Package=0402, Max Operating Temperature=125°C, Min Operating Temperature=-55°C, Tolerance=5%, Voltage Rating=50V, Mounting Technology=SM, Pins=2, RoHS Compliant=True
C85 C86 C90 C91 C95 C96: library part CMP-001-00092-2, "35V 22uF X5R ±20% 1210 Multilayer Ceramic Capacitors MLCC - SMD/SMT ROHS", Dielectric=X5R, LCSC Part #=C778721, Package=1210, Voltage=35V
D1: library part CMP-004-00043-1, "26V 17.8V Bidirectional 16V SMA(DO-214AC) ESD and Surge Protection (TVS/ESD) ROHS"
F1: library part CMP-00030-00001-1, "Fuse Block 30 A 500V 1 Circuit Blade Through Hole", LCSC Part #=C19727304
F2: library part CMP-005-00006-3, "POLY-FUSE(R) Resettable PTC, 12 V, 1.6 A, -40 to 85 degC, 2-Pin SMD, RoHS, Tape and Reel", Case/Package=1812, Current Rating=100A, Manufacturer=Littelfuse, Max Operating Temperature=85°C, Min Operating Temperature=-40°C, Nominal Supply Voltage=12V, Package Description="2-Pin Surface Mount Device, Body 4.55 x 3.24 mm", Package Quantity=1500, Resistance=100mohm, Datasheet URL=http://www.littelfuse.com/~/media/electronics/datasheets/resettable_ptcs/littelfuse_ptc_1812l_datasheet.pdf.pdf, Datasheet Version=Feb-16, Mounting Technology=SM, Package Reference=1812, Packaging=TapeandReel, RoHS Compliant=True
J1 J3A J3B J3C J3D: library part CMP-002-00130-1, "Conn USB Type C RCP 24 POS 0.25mm Solder RA SMD 24 Terminal 1 Port T/R", LCSC Part #=C464604
J2: library part CMP-002-00126-1, "USB Connector, 9 Contact(s), Female, Right Angle, Solder Terminal, Locking, Plug", Max Operating Temperature=85°C, Min Operating Temperature=-20°C, Connector Type="TELECOM AND DATACOM CONNECTOR", Mounting Technology=Board, RoHS Compliant=Yes
J4 J5: library part CMP-002-00078-3, "3x0.1\" pitch header"
J6: library part CMP-002-00125-2, "Rectangular Power Connector, 8 Contact(s), Male, Solder Terminal", Connector Type=Power,Rectangular, Mounting Technology=Board, RoHS Compliant=Yes
L1A L1B L1C L1D: library part CMP-006-00022-1, "20A 4.7uH Integrated molded inductor ±20% 24A SMD,12.6x13.5mm Power Inductors ROHS", LCSC Part #=C526021, Rated Current=20A, Resistance=9m, Saturation Current=24A
L2 L3 L4: library part CMP-006-00023-1, "2A 10uH ±20% 2.5A SMD,4.5x4.1mm Inductors (SMD) ROHS", Saturation Current=2.5A
NT1A NT1B NT1C NT1D NT2A NT2B NT2C NT2D: library part CMP-001-0002-2, "SMD Net Tie 8mil"
Q1A Q1B Q1C Q1D Q2A Q2B Q2C Q2D: library part CMP-013-00041-1, "MOSFET N-CH 30V 35A 8VSON", LCSC Part #=C97376
R1: library part CMP-009-00220-2, "62.5mW Thick Film Resistors 50V ±100ppm/℃ ±1% 200kΩ 0402 Chip Resistor - Surface Mount ROHS", LCSC Part #=C114763, Package=0402, Tolerance=1%
R2: library part CMP-009-00225-1, "62.5mW Thick Film Resistors 50V ±100ppm/℃ ±1% 910kΩ 0402 Chip Resistor - Surface Mount ROHS", LCSC Part #=C137927, Package=0402, Tolerance=1%
R3 R4 R5 R6 R31 R79 R80: library part CMP-009-00190-2, "62.5mW Thick Film Resistors 50V 0Ω 0402 Chip Resistor - Surface Mount ROHS", LCSC Part #=C60485, Package=0603, Tolerance=1%
R7 R14 R36A R36B R36C R36D: library part CMP-009-00201-3, "62.5mW Thick Film Resistors 50V ±100ppm/℃ ±1% 330Ω 0402 Chip Resistor - Surface Mount ROHS", LCSC Part #=C105875, Package=0402, Tolerance=1%
R8: library part CMP-009-00204-2, "100mW Thick Film Resistors 75V ±100ppm/℃ ±1% 5.1kΩ 0603 Chip Resistor - Surface Mount ROHS", LCSC Part #=C105580, Package=0603, Tolerance=1%
R9: library part CMP-009-00081-3, "22K 0.063W 1% 0402 (1005 Metric)  SMD", Case/Package=0402, Power=63mW, Tolerance=1%, Mounting Technology=SMT, Pins=2
R10 R11 R12 R13 R18 R20 R21 R24 R25 R26 R37A R37B R37C R37D: library part CMP-009-00187-1, "62.5mW Thick Film Resistors 50V ±100ppm/℃ ±1% 10kΩ 0402 Chip Resistor - Surface Mount ROHS", LCSC Part #=C60490, Package=0402, Tolerance=1%
R15: library part CMP-009-00226-1, "62.5mW Thick Film Resistors 50V ±100ppm/℃ ±5% 47kΩ 0402 Chip Resistor - Surface Mount ROHS", LCSC Part #=C163440, Package=0402, Tolerance=1%
R16: library part CMP-009-00227-1, "62.5mW Thick Film Resistors 50V ±100ppm/℃ ±1% 82kΩ 0402 Chip Resistor - Surface Mount ROHS", LCSC Part #=C137932, Package=0402, Tolerance=1%
R17: library part CMP-009-00219-1, "62.5mW Thick Film Resistors 50V ±100ppm/℃ ±1% 12kΩ 0402 Chip Resistor - Surface Mount ROHS", LCSC Part #=C114760, Package=0402, Tolerance=1%
R19 R22 R23 R28 R29 R59A R59B R59C R59D: library part CMP-009-00218-1, "62.5mW Thick Film Resistors 50V ±100ppm/℃ ±1% 100kΩ 0402 Chip Resistor - Surface Mount ROHS", LCSC Part #=C60491, Package=0402, Tolerance=1%
R27 R30: library part CMP-009-00197-1, "62.5mW Thick Film Resistors 50V ±100ppm/℃ ±5% 4.7kΩ 0402 Chip Resistor - Surface Mount ROHS", LCSC Part #=C105870, Package=0402, Tolerance=5%
R32 R33 R34: library part CMP-009-00220-1, "62.5mW Thick Film Resistors 50V ±100ppm/℃ ±1% 200kΩ 0402 Chip Resistor - Surface Mount ROHS", LCSC Part #=C114763, Package=0402, Tolerance=1%, Populated=Yes
R35A R35B R35C R35D R51A R51B R51C R51D R61A R61B R61C R61D: library part CMP-009-00218-2, "62.5mW Thick Film Resistors 50V ±100ppm/℃ ±1% 100kΩ 0402 Chip Resistor - Surface Mount ROHS", LCSC Part #=C60491, Package=0402, Tolerance=1%
R38A R38B R38C R38D R45A R45B R45C R45D R46A R46B R46C R46D R47A R47B R47C R47D R48A R48B R48C R48D R57A R57B R57C R57D R58A R58B R58C R58D R66A R66B R66C R66D: library part CMP-009-00232-1, "62.5mW Thick Film Resistors 50V ±5% 0Ω 0402 Chip Resistor - Surface Mount ROHS", LCSC Part #=C60485, Package=0402, Tolerance=5%
R39A R39B R39C R39D R40A R40B R40C R40D R41A R41B R41C R41D R42A R42B R42C R42D R43A R43B R43C R43D R44A R44B R44C R44D R78: library part CMP-009-00187-2, "62.5mW Thick Film Resistors 50V ±100ppm/℃ ±1% 10kΩ 0402 Chip Resistor - Surface Mount ROHS", LCSC Part #=C60490, Package=0402, Tolerance=1%
R49A R49B R49C R49D: library part CMP-009-00240-1, "62.5mW Thick Film Resistors 50V ±100ppm/℃ ±1% 1MΩ 0402 Chip Resistor - Surface Mount ROHS", LCSC Part #=C138033, Package=0402, Tolerance=1%
R50A R50B R50C R50D R70: library part CMP-009-00217-3, "62.5mW Thick Film Resistors 50V ±100ppm/℃ ±1% 162kΩ 0402 Chip Resistor - Surface Mount ROHS", LCSC Part #=C54068, Package=0402, Tolerance=1%
R52A R52B R52C R52D R53A R53B R53C R53D R54A R54B R54C R54D R55A R55B R55C R55D: library part CMP-009-00197-2, "62.5mW Thick Film Resistors 50V ±100ppm/℃ ±5% 4.7kΩ 0402 Chip Resistor - Surface Mount ROHS", LCSC Part #=C105870, Package=0402, Tolerance=5%
R56A R56B R56C R56D: library part CMP-009-00228-2, "100mW Thick Film Resistors ±100ppm/℃ ±1% 715kΩ 0402 Chip Resistor - Surface Mount ROHS", LCSC Part #=C2480300, Package=0402, Tolerance=1%
R60A R60B R60C R60D: library part CMP-009-00229-1, "1W 10mΩ ±70ppm/℃ ±1% 1206 Current Sense Resistors / Shunt Resistors ROHS", LCSC Part #=C105362, Package=1206, Tolerance=1%
R62A R62B R62C R62D: library part CMP-009-00230-2, "62.5mW Thick Film Resistors 50V ±100ppm/℃ ±1% 29.4kΩ 0402 Chip Resistor - Surface Mount ROHS", LCSC Part #=C26973, Package=0402, Tolerance=1%
R63A R63B R63C R63D: library part CMP-009-00185-3, "62.5mW Thick Film Resistors 50V ±100ppm/℃ ±1% 20kΩ 0402 Chip Resistor - Surface Mount ROHS", LCSC Part #=C93942, Package=0402, Tolerance=1%
R64A R64B R64C R64D: library part CMP-009-00231-1, "62.5mW Thick Film Resistors 50V ±100ppm/℃ ±1% 39kΩ 0402 Chip Resistor - Surface Mount ROHS", LCSC Part #=C137995, Package=0402, Tolerance=1%
R65A R65B R65C R65D: library part CMP-009-00233-1, "62.5mW Thick Film Resistors 50V ±100ppm/℃ ±1% 59kΩ 0402 Chip Resistor - Surface Mount ROHS", LCSC Part #=C163459, Package=0402, Tolerance=1%
R67 R68: library part CMP-009-00065-2, "100R 0.063W 1% 0402 (1005 Metric)  SMD", Case/Package=0402, Power=63mW, Tolerance=1%, Mounting Technology=SMT, Pins=2
R69 R72 R75: library part CMP-009-00237-1, "125mW Thick Film Resistors 150V ±5% 0Ω 0805 Chip Resistor - Surface Mount ROHS", LCSC Part #=C96345, Package=0805, Tolerance=1%
R71: library part CMP-009-00214-2, "62.5mW Thick Film Resistors 50V ±100ppm/℃ ±1% 30.9kΩ 0402 Chip Resistor - Surface Mount ROHS", LCSC Part #=C185428, Package=0402, Tolerance=1%
R73: library part CMP-009-00238-1, "62.5mW Thick Film Resistors 50V ±100ppm/℃ ±1% 180kΩ 0402 Chip Resistor - Surface Mount ROHS", LCSC Part #=C144794, Package=0402, Tolerance=1%
R74 R77: library part CMP-009-00239-1, "62.5mW Thick Film Resistors 50V ±100ppm/℃ ±1% 62kΩ 0402 Chip Resistor - Surface Mount ROHS", LCSC Part #=C137950, Package=0402, Tolerance=1%
R76: library part CMP-009-00200-2, "62.5mW Thick Film Resistors 50V ±100ppm/℃ ±1% 24.9kΩ 0402 Chip Resistor - Surface Mount ROHS", LCSC Part #=C25874, Package=0402, Tolerance=1%
SW1 SW2: library part CMP-011-00013-1, "Switch Tactile OFF (ON) SPST Rectangular Button Gull Wing 0.05A 12VDC SMD Loose Piece"
TP1A TP1B TP1C TP1D TP2A TP2B TP2C TP2D TP3A TP3B TP3C TP3D TP4A TP4B TP4C TP4D TP5A TP5B TP5C TP5D TP6A TP6B TP6C TP6D: library part CMP-001-0001-7, "45mil SMD test point"
TP7 TP8 TP9: library part CMP-00030-00002-1, "PC Test Point, Miniature Phosphor Bronze Silver Plating Surface Mount Mounting Type", LCSC Part #=C5199798
U1: library part CMP-015-00019-2, "Trans Voltage Suppressor Diode, 5V V(RWM), Unidirectional, 1 Element, Silicon", LCSC Part #=C7519
U2: library part CMP-001-0008-5, "10-Gbps USB 3.1 Type-C 2: 1 mux with DRP Controller 30-WQFN -40 to 85", LCSC Part #=C165155
U3: library part CMP-015-00019-1, "Trans Voltage Suppressor Diode, 5V V(RWM), Unidirectional, 1 Element, Silicon", LCSC Part #=C7519
U4: library part CMP-001-0012-2, "USB3.1 GEN2 Hub_no Pd_no Type C 100 VQFN 12X12X0.9MM Tray Rohs Compliant: Yes", Max Operating Temperature=85°C, Max Supply Voltage=3.6V, Min Operating Temperature=-40°C, Min Supply Voltage=1.09V, Height=900um, Interface=I2C,SPI,USB,I2S,SMBus
U5 U9A U9B U9C U9D: library part CMP-019-00052-3, "NOR Flash Serial (SPI, Dual SPI, Quad SPI) 3V/3.3V 128M-bit 16M x 8 6ns 8-Pin SOIC Tube"
U6A U6B U6C U6D: library part CMP-019-00064-3, "WQFN-20-EP(3x3) ESD and Surge Protection (TVS/ESD) ROHS", LCSC Part #=C2649810, Package=WQFN-20-EP
U7A U7B U7C U7D: library part CMP-001-0010-5, "2-channel 10-Gbps 2: 1/1: 2 USB 3.1 differential mux/demux 20-VQFN -40 to 85", Case/Package=VQFN, Max Operating Temperature=85°C, Max Supply Voltage=3.6V, Min Operating Temperature=-40°C, Min Supply Voltage=3V, Nominal Supply Current=600uA, -3db Bandwidth=8GHz, Data Rate=480Mbps, Height=1mm, Interface=USB, Lead Free="Lead Free", Length=4.5mm, Mounting Technology="Surface Mount", Number of Channels=2, Number of Ports=2, Packaging="Cut Tape", Pins=20, Reach SVHC Compliant=No, Series=-, Thickness=900um, USB Standard="USB 3.1", Width=2.5mm
U8A U8B U8C U8D: library part CMP-019-00062-1, "USB Type-C™ and USB PD controller with integrated power switches 56-VQFN -10 to 75"
U10A U10B U10C U10D: library part CMP-019-00063-2, "36V, 16A buck-boost converter with PPS control 26-VQFN-HR -40 to 150", LCSC Part #=C2864583
U11: library part CMP-020-00035-1, "Mainstream ARM Cortex-M0 Value line MCU with 128 Kbytes Flash, 48 MHz CPU, USB"
U12 U13 U14: library part CMP-019-00068-1, "Switching Regulator", LCSC Part #=C2071044
X1: library part CMP-003-00013-2, "SMD Seam Sealing Crystal, 8 MHz, +/- 30 ppm, 18 pF, -10 to 70 degC, 4-Pin SMD, RoHS, Tape and Reel", Case/Package=7B-4, Frequency=8MHz, Frequency Tolerance=30ppm, Load Capacitance=18pF, Manufacturer=TXC, Max Operating Temperature=70°C, Min Operating Temperature=-20°C, Package Description="4-Pin Surface Mount Device, Body 5 x 3.2 mm, Pitch 3.7 mm", Package Quantity=1000, Resistance=100Ohm, Datasheet URL=http://www.txccorp.com/download/products/quartz_crystals/2015TXC_7B_19.pdf, Datasheet Version=Jul-15, ESR=100, Mounting Technology=SM, Package Reference=7B-4, Packaging=TapeandReel, Pins=4, RoHS Compliant=True, Tolerance=30ppm
Y1: library part CMP-06255-000046-1, "MEMS OSC XO 25.0000MHZ CMOS SMD", Case/Package=SMD/SMT, Frequency=25MHz, Frequency Stability=50ppm, Load Capacitance=15pF, Max Operating Temperature=85°C, Max Supply Current=6.3mA, Max Supply Voltage=3.6V, Min Operating Temperature=-40°C, Min Supply Voltage=1.7V, Operating Supply Voltage=3.3V, Package Quantity=140, Ratings=AEC-Q100, Height=0.035inch, Length=0.098inch, Max Duty Cycle=55%, Mount="Surface Mount", Packaging=Rail/Tube, RoHS Compliant=Yes, Series=DSC1001, Termination=Solder, Width=0.079inch

## Free pads (board coordinates)
  round 4 hole 3.2: 20(2.652,2.596) 20(2.652,61.304) 20(186.588,2.596) 20(186.588,61.304)